# Altium PCB pcb_main.PcbDoc
Units mm, origin at the board's own origin, x right, y up, seen from the top; angles counter-clockwise.
Board outline 55 x 24 mm, 2 copper layers (Top Layer, Bottom Layer); 16 components, 15 nets, 82 pads, 19 vias.
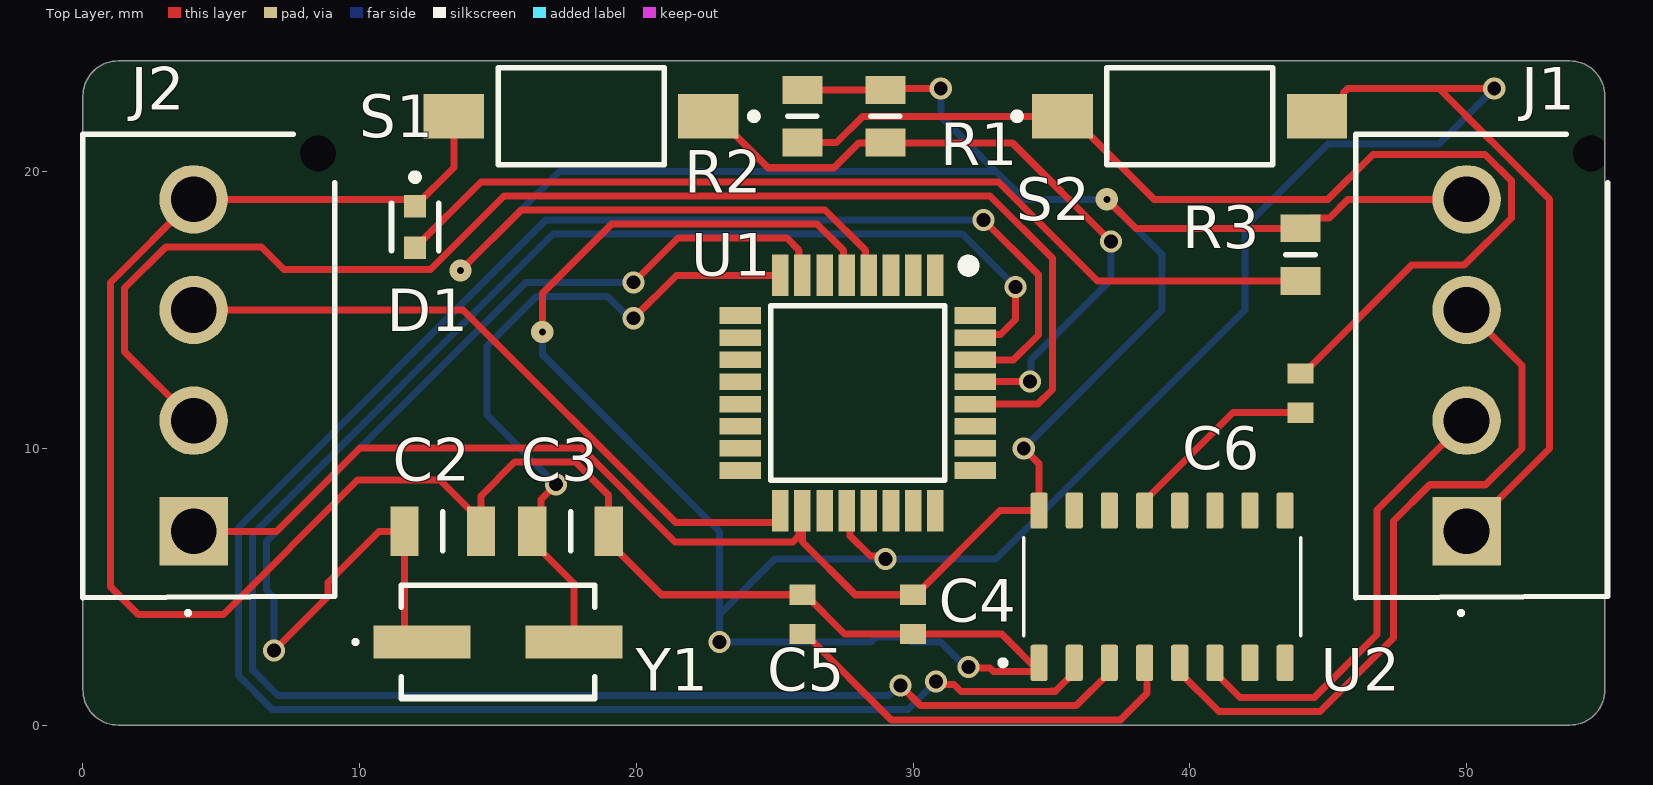
[diagram p0: Top Layer view]
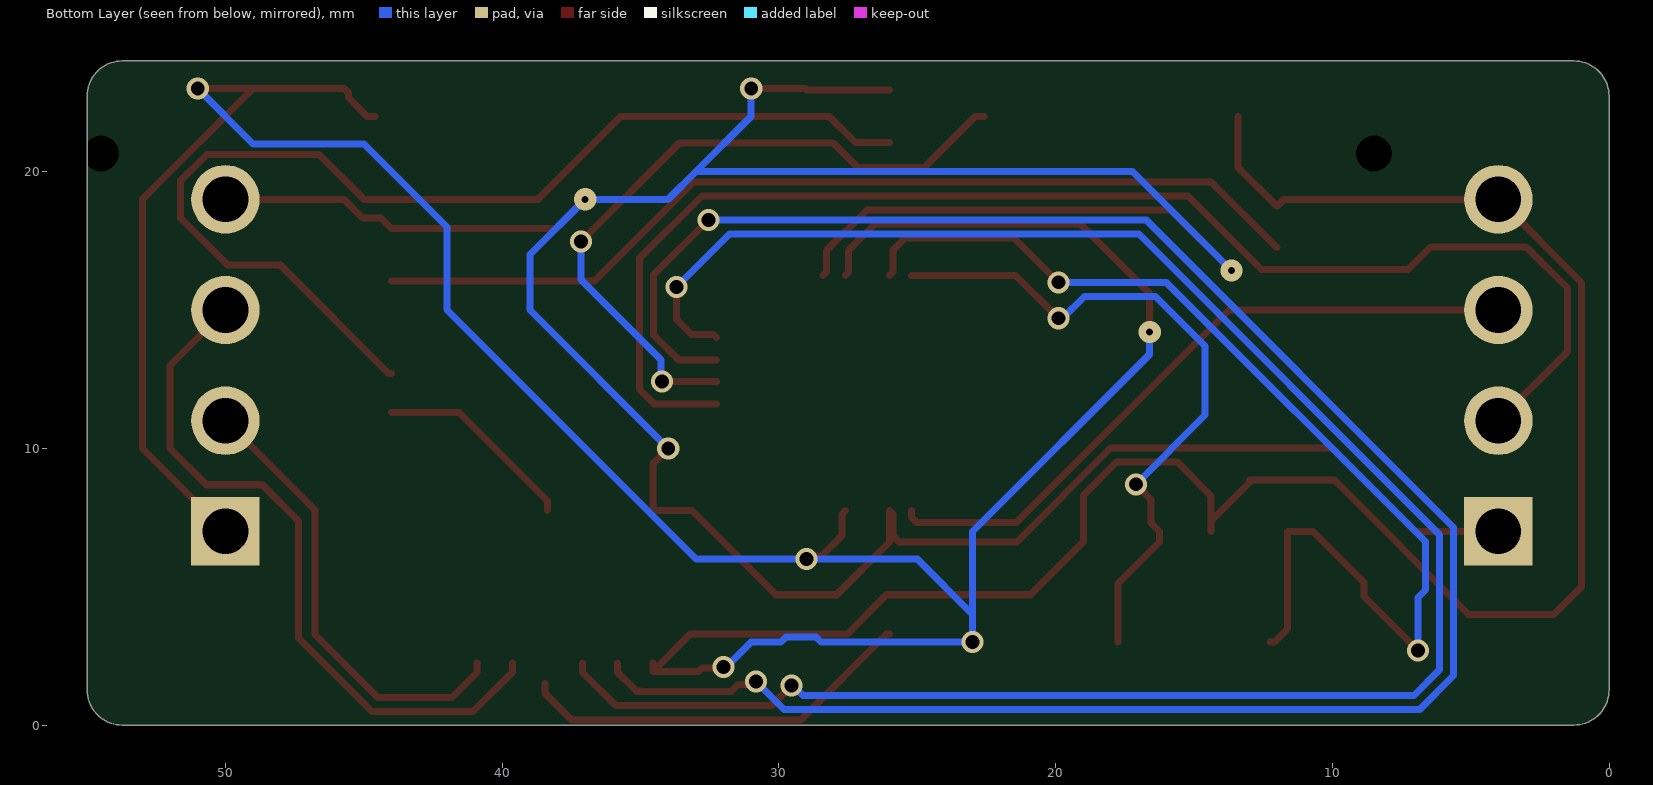
[diagram p1: Bottom Layer view, seen from below]
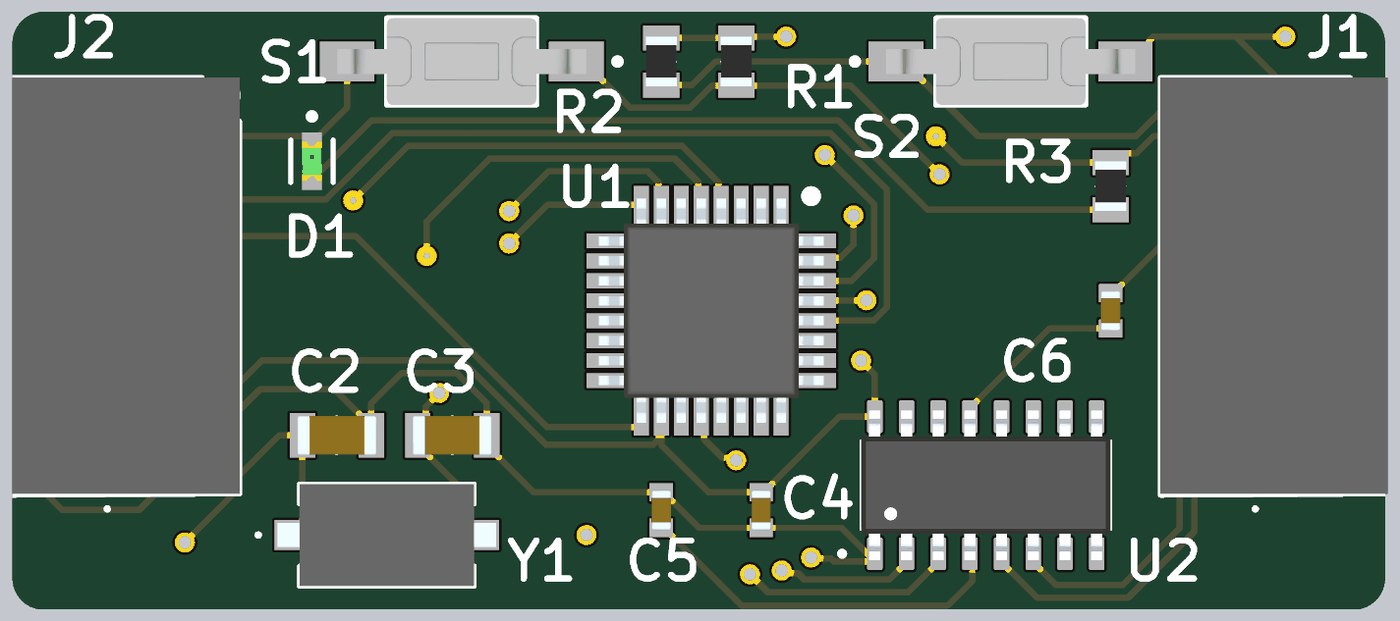
[diagram p2: 3D render of the assembled board from above, using the file's embedded part models]

## Layer stack, top to bottom
Top Solder: solder mask 0.0102, Solder Resist, Dk 3.5
Top Layer: signal copper 0.0356
Dielectric 1: dielectric 0.32, FR-4, Dk 4.8
Bottom Layer: signal copper 0.0356
Bottom Solder: solder mask 0.0102, Solder Resist, Dk 3.5

## Board outline
0,1.27 0,22.73 cw(c1.27,22.73) 1.27,24 53.73,24 cw(c53.73,22.73) 55,22.73 55,1.27 cw(c53.73,1.27) 53.73,0 1.27,0 cw(c1.27,1.27)

## Design rules (kind name [scope] priority, off if disabled: settings)
Clearance [All] p1 off: gap=0.254 ignorepadtopadclearanceinfootprint=FALSE except(0: Arc-Hole Track-Hole SMDPad-Hole THPad-Hole Via-Hole Fill-Hole Poly-Hole Region-Hole Text-Hole)
DiffPairsRouting [All] p1 off: maxlimit=0.254 minlimit=0.254 mostfreqgap=0.254 toplayer_minwidth=0.381 toplayer_maxwidth=0.381 toplayer_prefwidth=0.381 bottomlayer_minwidth=0.381 bottomlayer_maxwidth=0.381 bottomlayer_prefwidth=0.381 maxuncoupledlength=12.7
FanoutControl Fanout_BGA [IsBGA] p1 off: bgadir=Out bgaviamode=Centered fanoutstyle=Auto fanoutdirection=Alternating viagrid=0.025 // Fanout_BGA (Default Rule)
FanoutControl Fanout_LCC [IsLCC] p2 off: bgadir=Out bgaviamode=Centered fanoutstyle=Auto fanoutdirection=Alternating viagrid=0.025 // Fanout_LCC (Default Rule)
FanoutControl Fanout_SOIC [IsSOIC] p3 off: bgadir=Out bgaviamode=Centered fanoutstyle=Auto fanoutdirection=Alternating viagrid=0.025 // Fanout_SOIC (Default Rule)
FanoutControl Fanout_Small [(CompPinCount < 5)] p4 off: bgadir=Out bgaviamode=Centered fanoutstyle=Auto fanoutdirection=OutThenIn viagrid=0.025 // Fanout_Small (Default Rule)
FanoutControl Fanout_Default [All] p5 off: bgadir=Out bgaviamode=Centered fanoutstyle=Auto fanoutdirection=Alternating viagrid=0.025 // Fanout_Default (Default Rule)
PolygonConnect [All] p1: connectstyle=Relief reliefconductorwidth=0.254 reliefentries=4 polygonreliefangle="90 Angle" airgapwidth=0.254
RoutingCorners [All] p1 off: cornerstyle=45-Degree minsetback=2.54 maxsetback=2.54
RoutingLayers [All] p1 off: top layer_v5=TRUE bottom layer_v5=TRUE
RoutingPriority [All] p1 off: routingpriority=0
RoutingTopology [All] p1 off: topology=Shortest
RoutingVias [All] p1 off: holewidth=0.711 width=1.27 viastyle="Through Hole" minholewidth=0.711 minwidth=1.27 maxholewidth=0.711 maxwidth=1.27
ShortCircuit [All] p1 off: allowed=FALSE
SolderMaskExpansion [All] p1: expansion=0.102 istentingtop=FALSE
UnRoutedNet [All] p1 off:
UnpouredPolygon [All] p1 off:
Width [All] p1 off: maxlimit=0.254 minlimit=0.254 preferedwidth=0.254
17 further rules are at their usual default settings.

## Classes and differential pairs
component class main: J1 J2
component class "Serial Port": C4 C5 C6 D1 R2 R3 S2 U2
component class "Microcontroller Unit": C2 C3 R1 S1 U1 Y1

## Components (designator, comment, footprint, x,y, rotation, side; value= is the part's Value field where it differs from the comment)
C2 "22pF" CAPC3216X100N 13,7 r180 top
C3 "22pF" CAPC3216X100N 17.62,7 r180 top
C4 "100nF" CAPC1608X90N 30,4 r270 top
C5 "100nF" CAPC1608X90N 26,4 r90 top
C6 "100nF" CAPC1608X90N 44,12 r90 top
D1 "POWER" FP-LTST-C190GKT-MFG 12,18 r270 top
J1 "USB connector" B04BPSILEA1LFSN 50,7 r90 top
J2 "Accelerometer" B04BPSILEA1LFSN 4,7 r90 top
R1 "10K" RESC2012X75N 29,22 r90 top
R2 "10K" RESC2012X75N 26,22 r90 top
R3 "1K" RESC2012X75N 44,17 r90 top
S1 "FSMSM" TECO-FSMSM-2_V 18,22 r180 top
S2 "FSMSM" TECO-FSMSM-2_V 40,22 r0 top
U1 "ATMEGA328P-AU" QFP80P900X900X120-32N 28,12 r270 top
U2 "CH340G" SOIC127P600X180-16N 39,5 r90 top
Y1 "Clock" ECS160203XTR 15,3 r0 top

## Footprints (in the part's own frame and the unit in brackets; to place one, negate y for a bottom-side part, rotate by r counter-clockwise, add the part's x,y. Pads: shape width x height; smd on the part's side, far side on the other; paste and mask are expansions set on the pad)
B04BPSILEA1LFSN [mm]
  rect 2.475x2.475 hole 1.65: 1(0,0)
  round 2.475 hole 1.65: 2(4,0) 3(8,0) 4(12,0)
  round 0.65 hole 1.3 unplated: MH1(13.65,-4.5)
  silkscreen extent -3,-5.1 14.35,4, body extent -2.35,-5.1 14.35,4, height 12.45
CAPC1608X90N [mm]
  rect 0.73x0.94 smd: 1(-0.71,0) 2(0.71,0)
  body extent -0.8,-0.4 0.8,0.4, height 0.9
CAPC3216X100N [mm]
  rect 1.02x1.78 smd: 1(-1.38,0) 2(1.38,0)
  silkscreen extent 0,-0.7 0,0.7, body extent -1.6,-0.8 1.6,0.8, height 1
ECS160203XTR [mm]
  rect 3.5x1.2 smd: 1(-2.75,0) 2(2.75,0)
  silkscreen extent -5.2,-2.05 3.5,2.05, body extent -4.38,-2.05 4.38,2.05, height 2.4
FP-LTST-C190GKT-MFG [mm]
  rect 0.8x0.8 smd paste+0 mask+0: 1(-0.75,0) 2(0.75,0)
  silkscreen extent -1.92,-0.85 0.85,0.85, body extent -1.25,-0.55 1.25,0.55, height 0.25
QFP80P900X900X120-32N [mm]
  rect 1.5x0.6 smd: 1(-4.25,2.8) 2(-4.25,2) 3(-4.25,1.2) 4(-4.25,0.4) 5(-4.25,-0.4) 6(-4.25,-1.2) 7(-4.25,-2) 8(-4.25,-2.8) 17(4.25,-2.8) 18(4.25,-2) 19(4.25,-1.2) 20(4.25,-0.4) 21(4.25,0.4) 22(4.25,1.2) 23(4.25,2) 24(4.25,2.8)
  rect 0.6x1.5 smd: 9(-2.8,-4.25) 10(-2,-4.25) 11(-1.2,-4.25) 12(-0.4,-4.25) 13(0.4,-4.25) 14(1.2,-4.25) 15(2,-4.25) 16(2.8,-4.25) 25(2.8,4.25) 26(2,4.25) 27(1.2,4.25) 28(0.4,4.25) 29(-0.4,4.25) 30(-1.2,4.25) 31(-2,4.25) 32(-2.8,4.25)
  silkscreen extent -4.8,-3.15 3.15,4.2, body extent -4.5,-4.5 4.5,4.5, height 1.2
RESC2012X75N [mm]
  rect 1x1.45 smd: 1(-0.95,0) 2(0.95,0)
  silkscreen extent 0,-0.53 0,0.53, body extent -1,-0.63 1,0.63, height 0.75
SOIC127P600X180-16N [mm]
  rrect25% 1.31x0.62 smd: 1(-2.75,4.445) 2(-2.75,3.175) 3(-2.75,1.905) 4(-2.75,0.635) 5(-2.75,-0.635) 6(-2.75,-1.905) 7(-2.75,-3.175) 8(-2.75,-4.445) 9(2.75,-4.445) 10(2.75,-3.175) 11(2.75,-1.905) 12(2.75,-0.635) 13(2.75,0.635) 14(2.75,1.905) 15(2.75,3.175) 16(2.75,4.445)
  silkscreen extent -2.85,-5 1.78,5.85, body extent -3,-5 3,5, height 1.8
TECO-FSMSM-2_V [mm] "SMD, 2-Leads, Body 6x3.5mm, Pitch 9.19mm"
  rect 2.2x1.6 smd: 1(-4.595,0)
  rect 2.18x1.6 smd: 2(4.595,0)
  silkscreen extent -6.37,-1.75 3,1.75, body extent -4.98,-1.75 4.98,1.75, height 4.4

## Part data
C2 C3: library part CL31C220JBCNNNC, "Capacitor", Manufacturer_Name=SAMSUNG, Mouser Part Number=187-CL31C220JBCNNNC, Arrow Part Number=CL31C220JBCNNNC, Arrow Price/Stock=https://www.arrow.com/en/products/cl31c220jbcnnnc/samsung-electro-mechanics?region=nac, Datasheet Link=http://product.samsungsem.com/mlcc/CL31C220JBCNNN.do, Height=1mm, Manufacturer_Part_Number=CL31C220JBCNNNC, Mouser Price/Stock=https://www.mouser.co.uk/ProductDetail/Samsung-Electro-Mechanics/CL31C220JBCNNNC?qs=349EhDEZ59op%2FLhphPFLcA%3D%3D
C4 C5 C6: library part CL10B104JB8NNNC, "Capacitor", Manufacturer_Name=SAMSUNG, Mouser Part Number=187-CL10B104JB8NNNC, Arrow Part Number=CL10B104JB8NNNC, Arrow Price/Stock=https://www.arrow.com/en/products/cl10b104jb8nnnc/samsung-electro-mechanics?region=nac, Datasheet Link=https://datasheet.datasheetarchive.com/originals/distributors/Datasheets_SAMA/dd149ce8a6679b37799cedb31427d43d.pdf, Height=0.9mm, Manufacturer_Part_Number=CL10B104JB8NNNC, Mouser Price/Stock=https://www.mouser.co.uk/ProductDetail/Samsung-Electro-Mechanics/CL10B104JB8NNNC?qs=349EhDEZ59oLEw5wc1qvGw%3D%3D
D1: library part CMP-22017-000005-2, "LED GREEN CLEAR CHIP SMD", Case Code (Imperial)=0603, Case Code (Metric)=1608, Color=Green, Forward Current=30mA, Forward Voltage=2.1V, Lens Color=Colorless, Max Operating Temperature=85°C, Min Operating Temperature=-55°C, Package Quantity=1, Power Dissipation=100mW, Reverse Voltage=5V, Test Current=10mA, Voltage=2V, Case/Package=0603, Depth=0.8mm, Dominant Wavelength=569nm, Height=0.8mm, Illumination Color=Green, Lead Free="Lead Free", Length=1.6mm, Lens Style=Clear, Lens Transparency=Clear, Luminous Intensity=6mcd, Mount="Surface Mount", Number of Elements=1, Number of LEDs=1, Number of Pins=2, Packaging="Tape and Reel", Power Rating=100mW, Radiation Hardening=No, Viewing Angle=130°, Wavelength=565nm, Width=0.8mm
J1 J2: library part B04B-PSILE-A1_LF__SN_, "Connector", Manufacturer_Name="JST (JAPAN SOLDERLESS TERMINALS)", Manufacturer_Part_Number=B04B-PSILE-A1(LF)(SN), Datasheet Link=http://uk.rs-online.com/web/p/products/1383547, Height=12.35mm
R1 R2 R3: library part ERJ-P6WF1002V, "Resistor", Manufacturer_Name=Panasonic, Mouser Part Number=667-ERJ-P6WF1002V, Arrow Part Number=ERJ-P6WF1002V, Arrow Price/Stock=https://www.arrow.com/en/products/erj-p6wf1002v/panasonic?region=nac, Datasheet Link=https://datasheet.datasheetarchive.com/originals/distributors/DKDS-25/487413.pdf, Height=0.75mm, Manufacturer_Part_Number=ERJ-P6WF1002V, Mouser Price/Stock=https://www.mouser.co.uk/ProductDetail/Panasonic/ERJ-P6WF1002V?qs=%252B9%2Fcbd0IE0SZfBV6iDIV5A%3D%3D
S1 S2: library part CMP-2000-07511-1, "FSMSM Push Button Switch, 50 mA, -35 to 85 degC, 2-Pin SMD, RoHS, Bulk", Case\/Package=SMD/SMT, Contact Current Rating=50mA, Contact Resistance=100mOhm, Manufacturer="TE Connectivity", Max Operating Temperature=85degC, Max Voltage Rating (DC)=12V, Min Operating Temperature=-35degC, Operating Force=180gf, Package Description="2-Pin Surface Mount Device, Body 6 x 3.5 mm, Pitch 9.19 mm", Package Quantity=1000, Voltage Rating (DC)=24V, Actuator Length=1.07mm, Actuator Material=Polyamide, Contact Material=Brass, Contact Plating=Silver, Current Rating=50mA, Datasheet URL=http://www.te.com/commerce/DocumentDelivery/DDEController?Action=showdoc&DocId=Customer+Drawing%7F1437566-3%7FC2%7Fpdf%7FEnglish%7FENG_CD_1437566-3_C2_1437566_3_1_c.dwg.pdf%7F1437566-3, Datasheet Version="Rev. C2, 08/2014", Electrical Life=20000Cycles, ELV=Compliant, Illumination Type=Illuminated, Lead Free=LeadFree, Manufacturer URL=http://www.te.com/, Mechanical Life=20000Cycles, Mount=SurfaceMount, Mounting Technology=SurfaceMount, Orientation=Straight, Package Reference=FSMSM, Packaging=LoosePiece, REACH SVHC=Unknown, RoHSCompliant=true, Switch Travel=0.25mm, Termination=GullWing, Throw Configuration=SPST
U1: "Integrated Circuit", Manufacturer_Name=Microchip, Mouser Part Number=556-ATMEGA328P-AU, Arrow Part Number=ATMEGA328P-AU, Arrow Price/Stock=https://www.arrow.com/en/products/atmega328p-au/microchip-technology?region=europe, Datasheet Link=https://componentsearchengine.com/Datasheets/2/ATMEGA328P-AU.pdf, Height=1.2mm, Manufacturer_Part_Number=ATMEGA328P-AU, Mouser Price/Stock=https://www.mouser.co.uk/ProductDetail/Microchip-Technology/ATMEGA328P-AU?qs=K8BHR703ZXiCmmgp6%2FGNmQ%3D%3D
U2: "USB Interface Integrated Circuit", Package=None, Availability="Not in stock", Check_prices=https://www.snapeda.com/parts/Ch340G/WCH/view-part/?ref=eda, MF=WCH, MP=Ch340G, Price=None, SnapEDA_Link=https://www.snapeda.com/parts/Ch340G/WCH/view-part/?ref=snap
Y1: library part ECS-160-20-3X-TR, "Crystal or Oscillator", Manufacturer_Name=ECS, Mouser Part Number=520-160-20-3XT, Arrow Part Number=ECS-160-20-3X-TR, Arrow Price/Stock=https://www.arrow.com/en/products/ecs-160-20-3x-tr/ecs-international?region=nac, Datasheet Link=https://www.arrow.com/en/products/ecs-160-20-3x-tr/ecs-international, Height=2.3mm, Manufacturer_Part_Number=ECS-160-20-3X-TR, Mouser Price/Stock=https://www.mouser.co.uk/ProductDetail/ECS/ECS-160-20-3X-TR?qs=7Z%2FjUg96RbU1ElbRFXn8Rw%3D%3D

## Via types
v1: diameter 0.8, hole 0.5, Top Layer to Bottom Layer, 16 vias
v2: diameter 0.8, hole 0.25, Top Layer to Bottom Layer, 3 vias

## Nets (pads, with @x,y where several pads share a name; then routed paths per layer and width w, separated by ;. In a path a pad name is that pad's centre, name@x,y a point inside that pad or via, vN(x,y) a via of type N, cw(c..) or ccw(c..) an arc to the next point about the centre after c; other vN are vias at no path point)
GND: C2.1 C3.1 C4.2 C5.2 D1.1 J1.1 J2.4 S1.2 S2.2 U1.5 U1.20 U2.1 | length 176.7
  Top Layer w0.254: S1.2 13.405,20.155 D1.1 11.75,19 J2.4 1,16 1,5 2,4 5.074,4 9.926,8.851 13,8.851 13,8.76 C2.1@14.38,7.38 ; C2.1 C2.1@14.38,7.38 ; v2(16.6,14.2) 16.6,15.6 19.108,18.108 26.531,18.108 27.481,17.158 27.481,16.369 U1.5 ; U1.20 27.719,7.631 27.719,6.842 28.457,6.104 28.896,6.104 v1(29,6) ; v1(32,2.097) 32.03,2.067 32.781,2.067 32.908,1.94 U2.1@34.555,1.94 ; U2.1 U2.1@34.555,1.94 ; S2.2 44.885,22 45.558,22.673 45.558,22.851 45.707,23 49,23 ; J1.1 53,10 53,19 52.126,19.874 52.126,19.881 50.881,21.127 50.873,21.127 49,23 ; v1(51,23) 49,23 ; C2.1@14.38,7.38 14.38,8.28 15.6,9.5 17.8,9.5 19,8.3 19,6.62 20.91,4.71 C5.2 26.105,4.71 27.525,3.29 C4.2 33.205,3.29 U2.1@34.555,1.94
  Bottom Layer w0.254: v2(16.6,14.2) 16.6,13.4 23,7 23,4 ; v1(32,2.097) 31.903,2.097 31,3 29.923,3 29.734,3.189 28.666,3.189 28.477,3 v1(23,3) 23,4 ; v1(51,23) 49,21 45,21 42,18 42,15 33,6 v1(29,6) 25,6 23,4
NetC2_2: C2.2 U1.7 Y1.1 | length 40.1
  Top Layer w0.254: v1(6.908,2.7) 8.856,4.648 8.856,5.156 10.7,7 C2.2 11.62,3.473 12.093,3 Y1.1 ; v1(19.9,16) 21.5,17.6 25.439,17.6 25.881,17.158 25.881,16.369 U1.7
  Bottom Layer w0.254: v1(6.908,2.7) 6.908,4.605 6.635,4.878 6.635,6.635 16,16 v1(19.9,16)
NetC3_2: C3.2 U1.8 Y1.2 | length 25
  Top Layer w0.254: v1(17.1,8.7) 16.548,8.148 16.548,7.308 C3.2 16.24,6.62 17.75,5.11 Y1.2 ; v1(19.9,14.7) 21.45,16.25 U1.8
  Bottom Layer w0.254: v1(17.1,8.7) 14.6,11.2 14.6,13.7 16.392,15.492 18.96,15.492 19.752,14.7 v1(19.9,14.7)
NetC5_1: C5.1 U2.4 | length 14.5
  Top Layer w0.254: C5.1 26.105,3.29 29.22,0.175 37.48,0.175 38.46,1.155 38.46,1.5
NetC6_1: C6.1 U2.13 | length 7.3
  Top Layer w0.254: U2.13 38.365,8.095 41.56,11.29 C6.1
NetC6_2: C6.2 R2.1 S2.1 | length 39.6
  Top Layer w0.254: R2.1 27.236,21.05 28.186,22 S2.1 35.705,22 38.705,19 45,19 46.618,20.619 50.67,20.619 51.618,19.67 51.618,18.33 49.907,16.619 48.014,16.619 44.105,12.71 C6.2
NetD1_2: D1.2 R3.1 | length 34.5
  Top Layer w0.254: D1.2 14.382,19.632 33.086,19.632 36.668,16.05 R3.1
NetJ1_2: J1.2 U2.6 | length 16.6
  Top Layer w0.254: U2.6 40.905,1.905 41.81,1 44.498,1 46.769,3.27 46.769,7.769 J1.2
NetJ1_3: J1.3 U2.5 | length 25.5
  Top Layer w0.254: U2.5 39.635,1.905 41.048,0.492 44.709,0.492 47.357,3.14 47.357,7.37 48.671,8.685 50.685,8.685 52,10 52,13 J1.3
NetJ2_2: J2.2 U1.28 | length 50.1
  Top Layer w0.254: J2.2 1.508,13.492 1.508,15.79 2.993,17.275 6.457,17.275 7.263,16.469 12.558,16.469 15.213,19.124 32.781,19.124 35.033,16.872 35.033,12.128 34.505,11.6 U1.28
NetJ2_3: J2.3 U1.17 | length 24.7
  Top Layer w0.254: J2.3 13.737,15 21.408,7.329 25.027,7.329 25.2,7.502 U1.17
NetR1_1: R1.1 S1.1 U1.29 | length 25.4
  Top Layer w0.254: S1.1 22.895,22 24.755,20.14 27.14,20.14 28.043,21.043 33.582,21.043 v1(37.15,17.475) ; U1.29 32.259,12.409 34.209,12.409 v1(34.219,12.419)
  Bottom Layer w0.254: v1(34.219,12.419) 34.258,12.458 34.258,13.2 37.15,16.092 v1(37.15,17.475)
NetU1_30: U1.30 U2.2 | length 76.4
  Top Layer w0.254: v1(30.825,1.575) 30.929,1.471 31.476,1.471 31.733,1.214 34.977,1.214 34.986,1.223 35.143,1.223 35.236,1.316 35.825,1.905 U2.2 ; U1.30 33.625,13.2 34.525,14.1 34.525,16.275 v1(32.55,18.25)
  Bottom Layer w0.254: v1(30.825,1.575) 29.817,0.567 6.84,0.567 5.619,1.788 5.619,7.144 16.725,18.25 v1(32.55,18.25)
NetU1_31: U1.31 U2.3 | length 73.3
  Top Layer w0.254: v1(29.55,1.425) 30.275,0.7 35.89,0.7 37.095,1.905 U2.3 ; U1.31 32.369,14.119 33.158,14.119 33.7,14.661 v1(33.7,15.825)
  Bottom Layer w0.254: v1(29.55,1.425) 29.478,1.425 29.128,1.075 7.05,1.075 6.127,1.998 6.127,6.877 16.992,17.742 31.783,17.742 v1(33.7,15.825)
VCC: C4.1 J1.4 J2.1 R1.2 R2.2 R3.2 U1.4 U1.18 U2.16 | length 116.8
  Top Layer w0.254: J2.1 7,7 10.008,10.008 18.01,10.008 21.399,6.619 25.658,6.619 25.881,6.842 25.881,7.631 U1.18 26,7.631 26,6.842 26,6.619 27.909,4.71 C4.1 30.105,4.71 33.145,7.75 U2.16 34.555,9.445 v1(34,10) ; v2(13.65,16.425) 15.841,18.616 26.823,18.616 28.281,17.158 28.281,16.369 U1.4 ; R2.2 R1.2 cw(c29.05,22.95) 29.05,23 v1(31,23) ; v2(37,19) 38.05,17.95 R3.2 44.373,18.323 45.041,18.323 45.718,19 J1.4
  Bottom Layer w0.254: v2(13.65,16.425) 17.225,20 33,20 ; v1(31,23) 31,22 33,20 ; v1(34,10) 39,15 39,17 v2(37,19) 34,19 33,20
pads on no net: J1.MH1 J2.MH1 U1.1 U1.2 U1.3 U1.6 U1.9 U1.10 U1.11 U1.12 U1.13 U1.14 U1.15 U1.16 U1.19 U1.21 U1.22 U1.23 U1.24 U1.25 U1.26 U1.27 U1.32 U2.7 U2.8 U2.9 U2.10 U2.11 U2.12 U2.14 U2.15

## Silkscreen, mask and mechanical layers (free items; w line width, h text height)
Mechanical 1:
  lines w0.254: 0,1.27 ccw(c1.27,1.27) 1.27,0 2,0 53.73,0 ccw(c53.73,1.27) 55,1.27 55,22.73 ccw(c53.73,22.73) 53.73,24 1.27,24 ccw(c1.27,22.73) 0,22.73 0,1.27